# Allegro board CAD_EX73022.brd
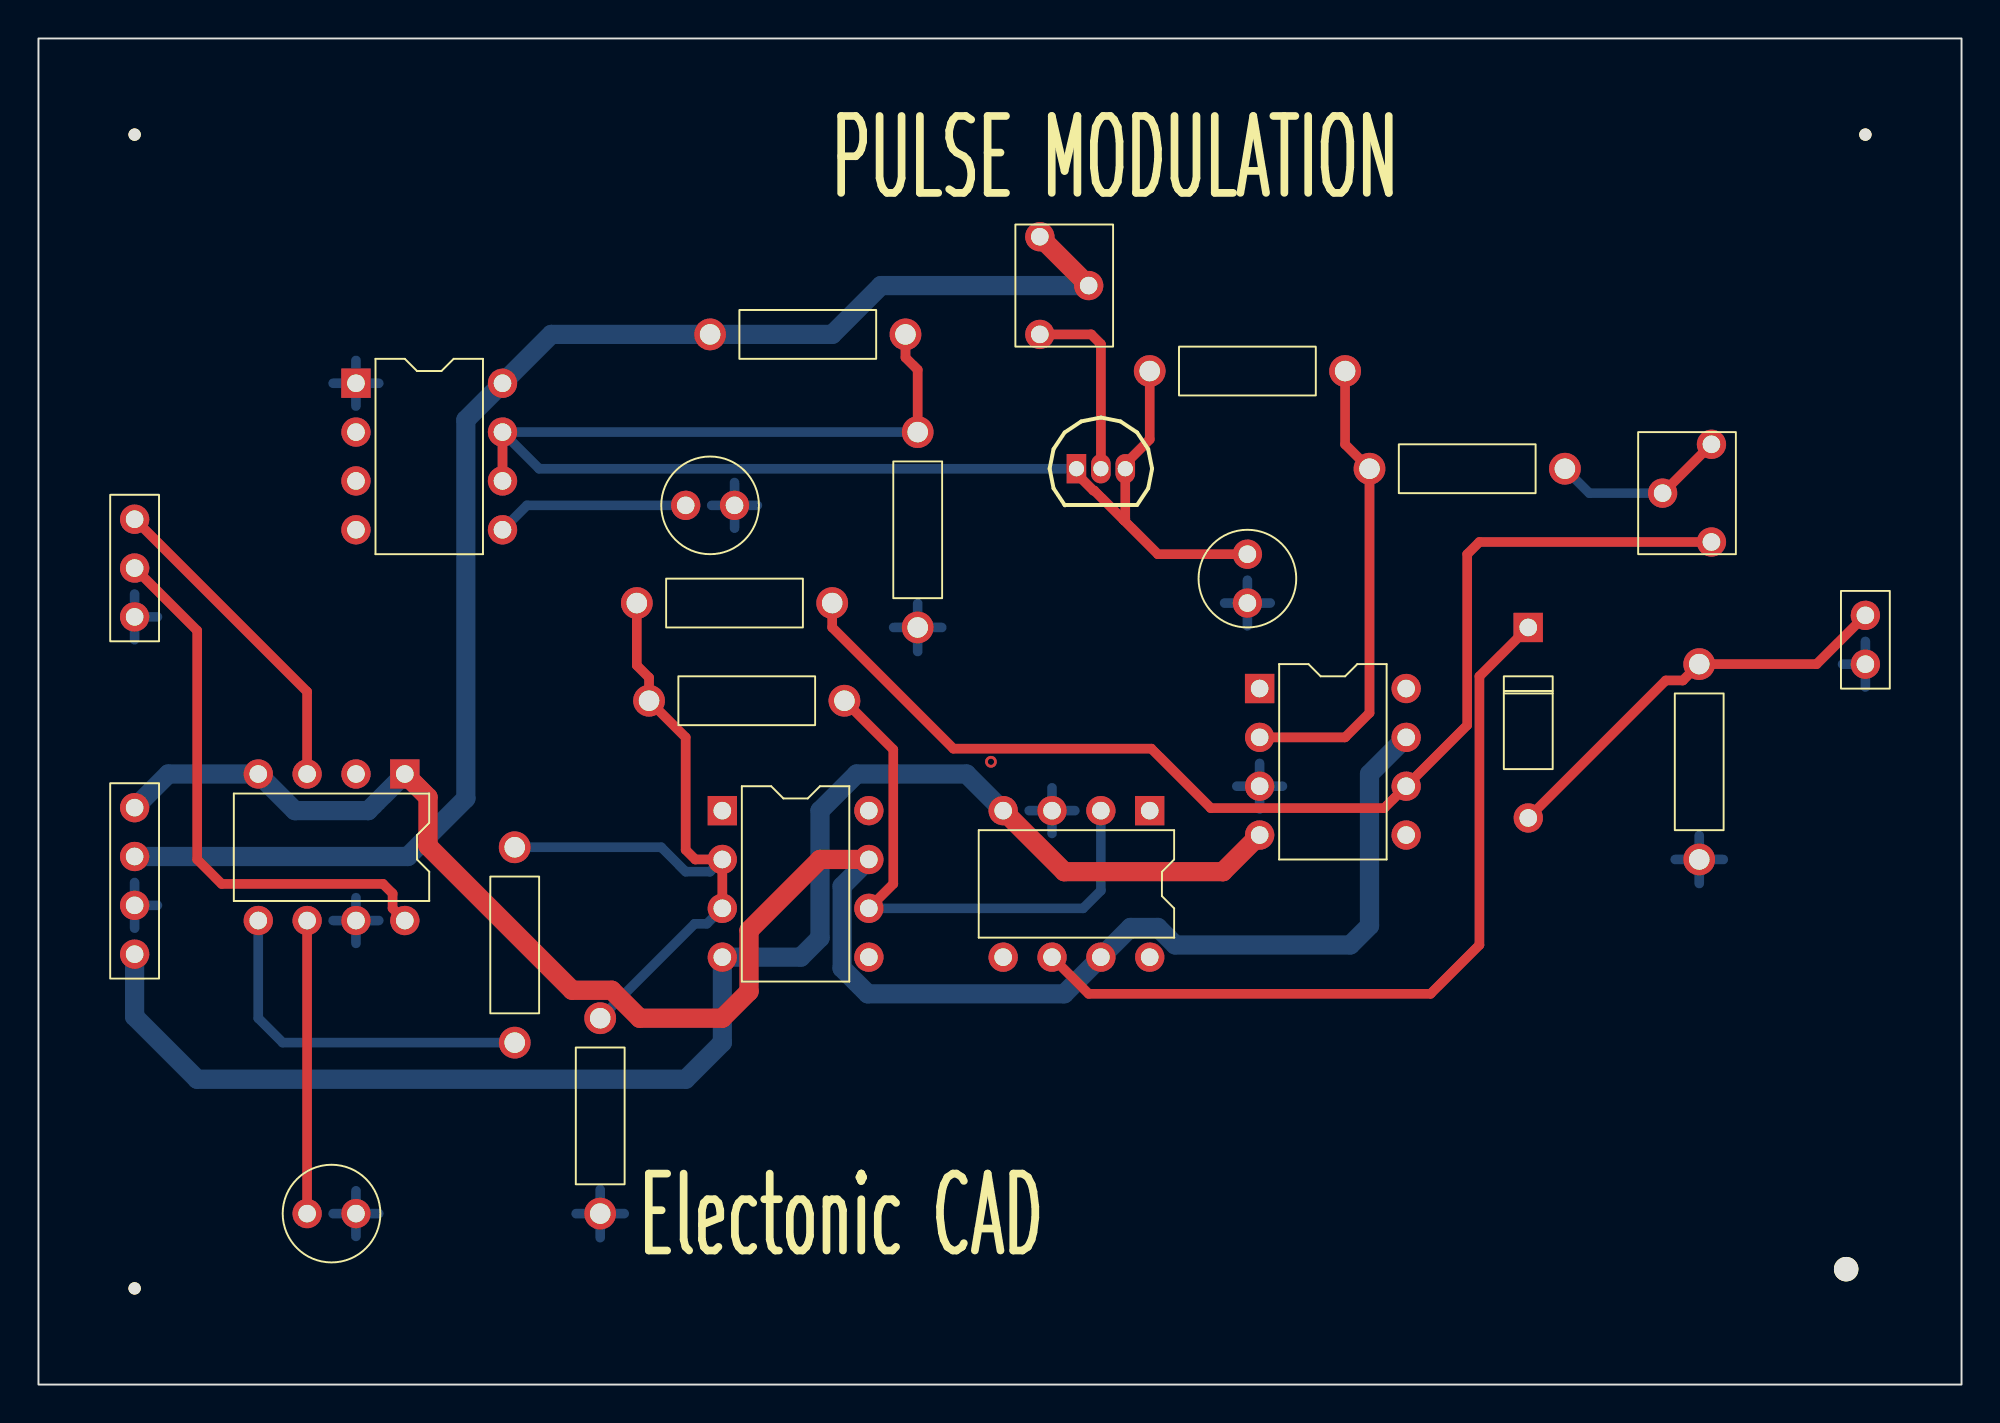
[diagram p0: board, top side]
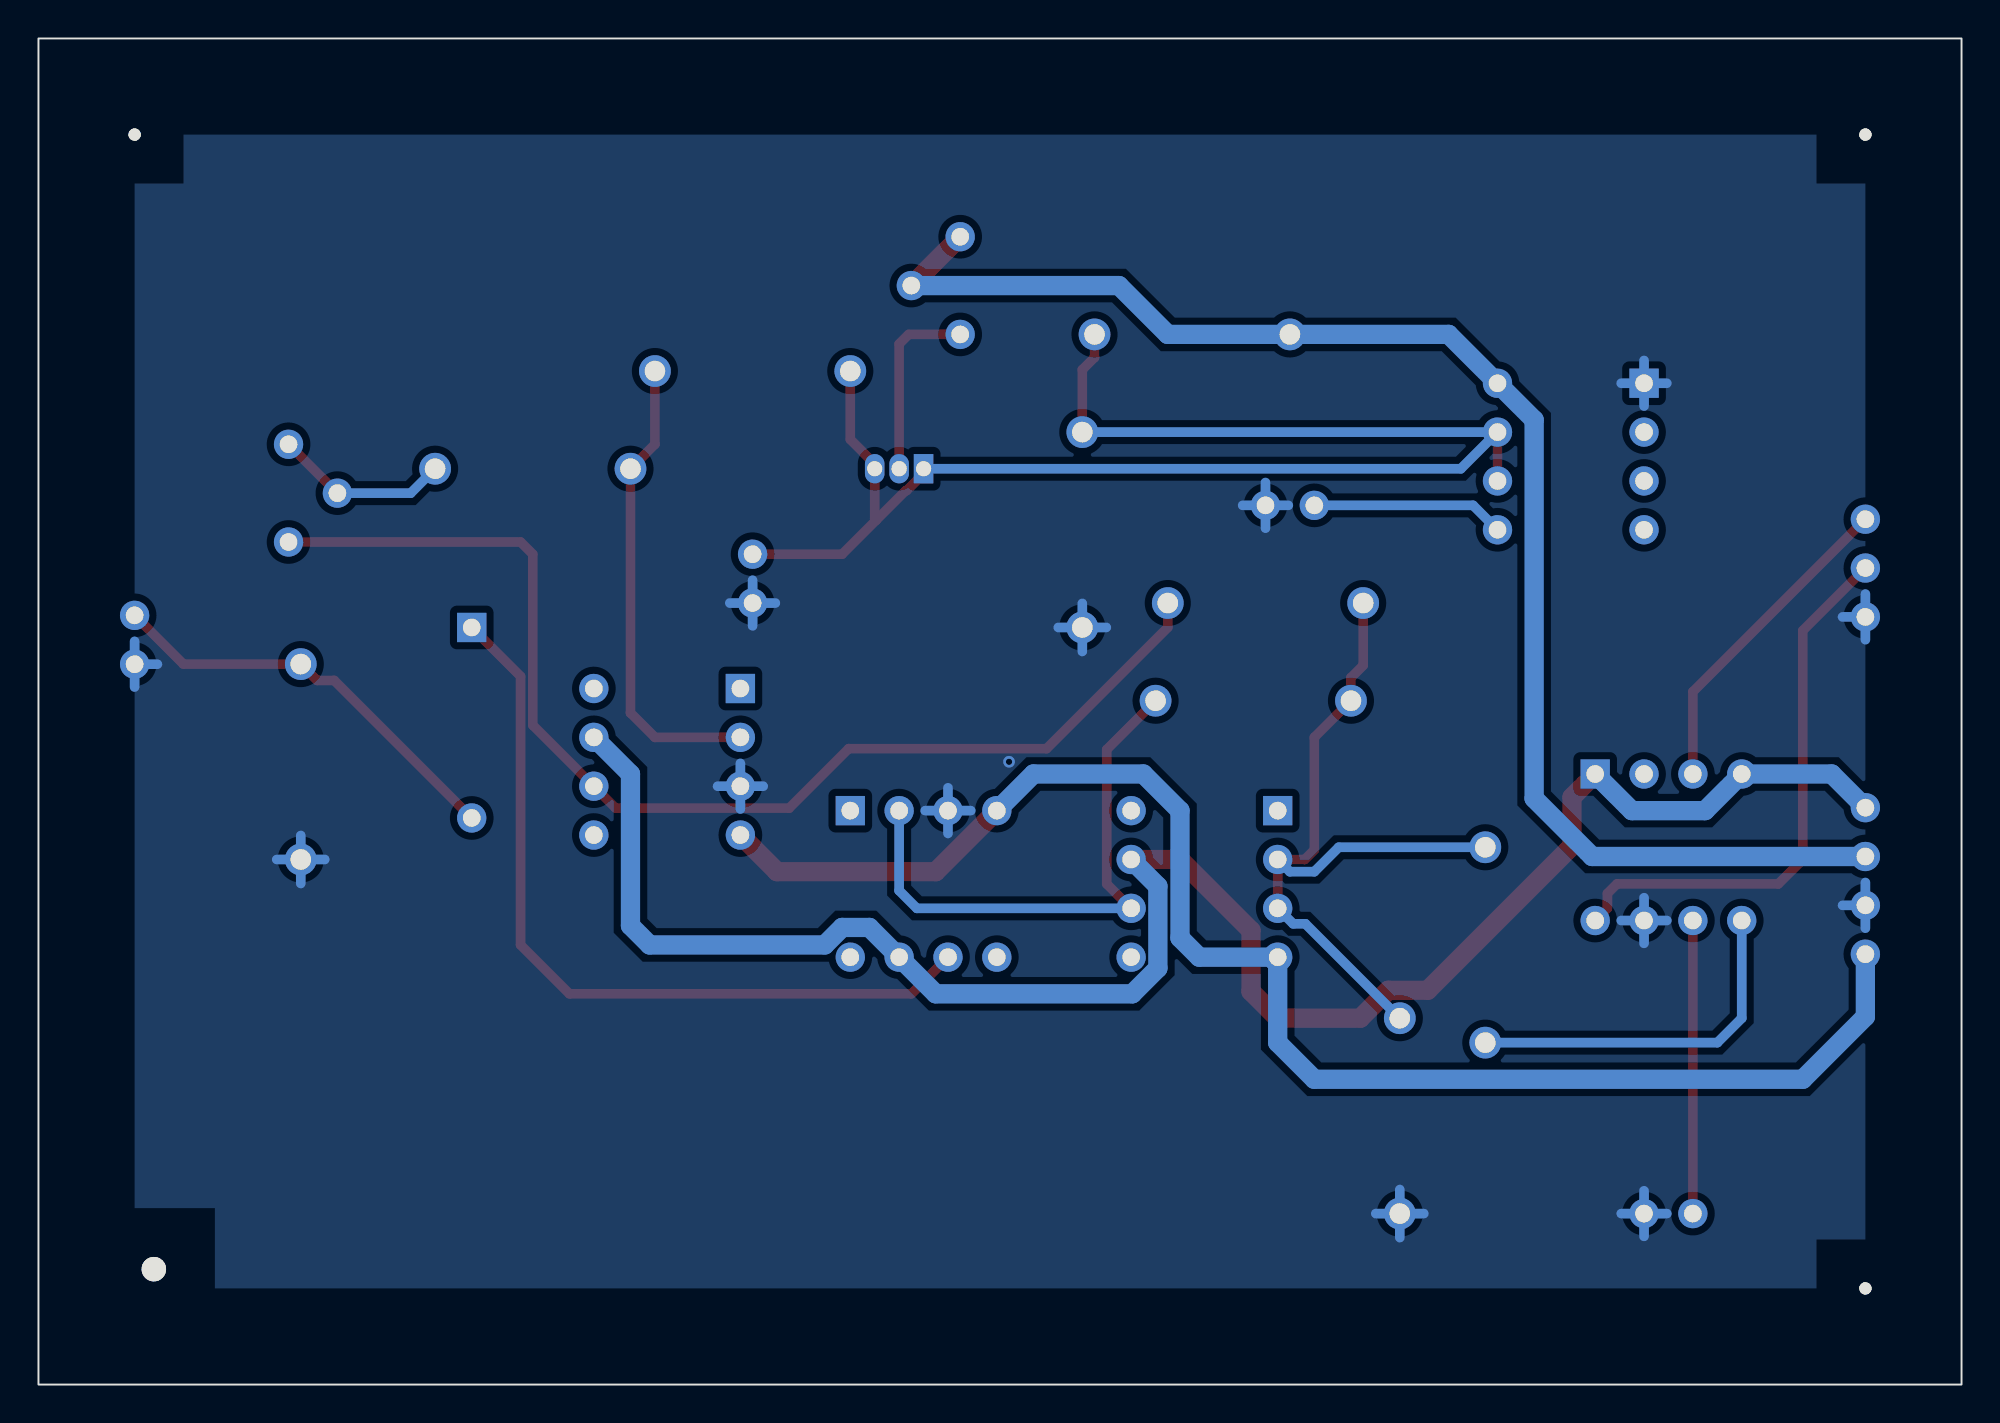
[diagram p1: board, bottom side, seen from below]

Outline 100 x 70 mm; copper layers: TOP, BOTTOM. Coordinates in mm from the lower left corner of the outline.
Outline path: rectangle 0,0 100,70

## Design rules (mm)
constraint set DEFAULT: min track width 0.5

## Placement (name value [footprint] x y rotation side)
C1  0.01uF  [CAP196]  62.87 43.18 180 top
C2  0.01uF  [CAP196]  36.2 45.72 90 top
C3  0.01uF  [CAP196]  13.97 8.89 270 top
D1  d  [DO41]  77.47 39.37 180 top
J1  CON4  [JUMPER4]  5 30 270 top
J2  CON3  [JUMPER3]  5 45 270 top
J3  CON2  [JUMPER2]  95 40 270 top
NOREF  -  [unnamed]  5 5 0 top
NOREF#2  -  [unnamed#2]  94 6 0 top
NOREF#3  -  [unnamed]  5 65 0 top
NOREF#4  -  [unnamed]  95 65 0 top
Q1  25A1015  [TO92]  53.98 47.62 0 top
R1  580  [RES400]  69.22 47.62 270 top
R2  39K  [RES400]  34.92 54.61 270 top
R3  6.2K  [RES400]  57.78 52.7 270 top
R4  100K  [RES400]  45.72 49.53 180 top
R5  10K  [RES400]  41.27 40.64 90 top
R6  10K  [RES400]  31.75 35.56 270 top
R7  10K  [RES400]  24.77 17.78 0 top
R8  10K  [RES400]  29.21 8.89 0 top
R9  10K  [RES400]  86.36 27.3 0 top
U1  NE555  [DIP8_3]  16.51 52.07 0 top
U2  LF356  [DIP8_3]  63.5 36.2 0 top
U3  LF398  [DIP8_3]  19.05 31.75 270 top
U4  LF356  [DIP8_3]  35.56 29.84 0 top
U5  LF356  [DIP8_3]  57.78 29.84 270 top
VR1  5K  [RESADJ]  52.07 54.61 180 top
VR2  20K  [RESADJ]  87 48.9 0 top

## Library data of the parts
C1-C3 = CAP NP: Tolerance: ***; User Part Number: ***
D1 = d_0
J1 = CON4_0: User Part Number: ***
J2 = CON3_0: User Part Number: ***
J3 = CON2: User Part Number: ***
Q1 = PNP BCE
R1-R9 = R: Tolerance: ***; User Part Number: ***
U1 = NE555_4: Tolerance: ***; User Part Number: ***
U2 = LF356_3: Tolerance: ***; User Part Number: ***
U3 = LF398: Tolerance: ***; User Part Number: ***
U4 U5 = LF356_2: Tolerance: ***; User Part Number: ***
VR1 VR2 = POT: Tolerance: ***; User Part Number: ***

## Footprints (pads in the part's own frame, mm; a bottom-side part is the same pattern mirrored in y, then rotated)
CAP196
  round 1.524 hole 0.914: 1(0,0) 2(0,2.54)
DIP8_3
  rect 1.524x1.524 hole 0.914: 1(0,0)
  round 1.524 hole 0.914: 2(0,-2.54) 3(0,-5.08) 4(0,-7.62) 5(7.62,-7.62) 6(7.62,-5.08) 7(7.62,-2.54) 8(7.62,0)
DO41
  rect 1.524x1.524 hole 0.914: 1(0,0)
  round 1.524 hole 0.914: 2(0,9.906)
JUMPER2
  round 1.524 hole 0.914: 1(0,0) 2(2.54,0)
JUMPER3
  round 1.524 hole 0.914: 1(0,0) 2(2.54,0) 3(5.08,0)
JUMPER4
  round 1.524 hole 0.914: 1(0,0) 2(2.54,0) 3(5.08,0) 4(7.62,0)
RES400
  round 1.651 hole 1.067: 1(0,0) 2(0,10.16)
RESADJ
  round 1.524 hole 0.914: 1(0,0) 2(-2.54,-2.54) 3(0,-5.08)
TO92
  rect 1.016x1.524 hole 0.787: 1(0,0)
  oval 1.016x1.524 hole 0.787: 2(1.27,0) 3(2.54,0)
unnamed
  round 0.635 hole 3.175 unplated: (0,0)
unnamed#2
  round 1.27 hole 3.962 unplated: (0,0)

## Nets
+5V: J1.2 R2.1 U1.8(VCC) VR1.2(WIPER) VR1.3
+15V: J1.1 U2.7(V5) U3.1 U3.4(VCC-) U4.7 U5.7
-15V: J1.4 U2.4 U4.4(V-) U5.4(V-)
GND: C1.2 C2.1 C3.2 J1.3 J2.3 J3.2 R4.2 R8.1 R9.1 U1.1 U2.3 U3.7 U5.3
CLOCK: U1.2
SIG_1: R5.1 U2.6 VR2.3
N00375: C1.1 Q1.1 Q1.3(E) R2.2 R3.1 R4.1 U1.6 U1.7
N00403: C2.2 U1.5
N00660: Q1.2 VR1.1
N01426: R1.1 R3.2 U2.2
N02047: R1.2 VR2.1 VR2.2(WIPER)
N03268: J2.1 U3.3
N03284: J2.2 U3.8
N03449: C3.1 U3.6
N03576: R7.1 U3.5
N03657: R5.2 R6.1 R7.2 R8.2 U4.2 U4.3
N04198: R6.2 U4.6 U5.2
N04568: D1.1 U5.6
N04574: D1.2 J3.1 R9.2

Pads without a net: U1 3 4; U2 1 5 8; U3 2; U4 1 5 8; U5 1 5 8

## Via types
v1: diameter 0.61, hole 0.33, TOP to BOTTOM, 1 via

## Routing (per net, layer and track width the routed paths; a pad name or vN(x,y) marks a point on that pad's centre or on a via; arc(x,y) is an arc through that point)
+5V: length 77
  TOP w1: VR1.2 VR1.3
  BOTTOM w1: J1.2 19.2,27.46 22.23,30.48 22.23,50.16 U1.8 26.67,54.61 R2.1 41.27,54.61 43.81,57.15 VR1.2
+15V: length 99.5
  TOP w1: U4.7 40.64,27.3 36.95,23.61 36.95,20.44 35.56,19.05 31.26,19.05 29.81,20.5 27.76,20.5 20.26,28 20.26,30.54 U3.1
  BOTTOM w1: U2.7 69.22,31.75 69.22,23.86 68.22,22.86 59.11,22.86 58.2,23.77 56.79,23.77 U5.7 53.34,20.32 43.12,20.32 41.79,21.65 41.79,25.92 U4.7 ; U3.1 17.14,29.84 13.34,29.84 U3.4 6.75,31.75 J1.1
-15V: length 79
  TOP w1: U2.4 61.59,26.67 53.34,26.67 U5.4
  BOTTOM w1: J1.4 5,19.13 8.26,15.88 33.66,15.88 35.56,17.78 U4.4 39.64,22.23 40.64,23.23 40.64,29.84 42.55,31.75 48.26,31.75 U5.4
GND: length 58.9
  BOTTOM w0.5: J1.3 6.19,24.92 ; J1.3 5,23.73 ; J1.3 5,26.11 ; U2.3 63.5,32.3 ; U2.3 62.31,31.11 ; U2.3 64.69,31.11 ; U2.3 63.5,29.93 ; 35.01,45.72 C2.1 ; C2.1 37.38,45.72 ; C2.1 36.2,46.91 ; C2.1 36.2,44.53 ; U3.7 17.7,24.13 ; U3.7 15.32,24.13 ; U3.7 16.51,22.94 ; U3.7 16.51,25.32 ; J2.3 6.19,39.92 ; J2.3 5,38.73 ; J2.3 5,41.11 ; 95,36.27 J3.2 ; J3.2 95,38.65 ; J3.2 93.81,37.46 ; 16.51,7.7 C3.2 ; C3.2 16.51,10.08 ; C3.2 15.32,8.89 ; C3.2 17.7,8.89 ; C1.2 64.05,40.64 ; C1.2 62.87,41.83 ; C1.2 61.68,40.64 ; C1.2 62.87,39.45 ; 29.21,7.64 R8.1 ; R8.1 29.21,10.14 ; R8.1 27.96,8.89 ; R8.1 30.46,8.89 ; R9.1 86.36,28.55 ; R9.1 85.11,27.3 ; R9.1 87.61,27.3 ; R9.1 86.36,26.06 ; 45.72,38.12 R4.2 ; R4.2 45.72,40.62 ; R4.2 46.97,39.37 ; R4.2 44.47,39.37 ; U1.1 17.7,52.07 ; U1.1 16.51,50.88 ; U1.1 16.51,53.26 ; U1.1 15.32,52.07 ; 51.52,29.84 U5.3 ; U5.3 52.7,28.66 ; U5.3 53.89,29.84 ; U5.3 52.7,31.03
  vias: v1(49.53,32.38)
SIG_1: length 61.8
  TOP w0.5: VR2.3 74.93,43.81 74.3,43.18 74.3,34.29 U2.6 69.98,29.98 60.96,29.98 57.87,33.07 47.58,33.07 41.27,39.37 R5.1
N00375: length 79.3
  TOP w0.5: C1.1 58.21,43.18 56.44,44.95 ; 56.44,44.95 54.9,46.49 54.86,46.49 53.98,47.37 Q1.1 ; 56.44,44.95 56.52,45.03 Q1.3 56.52,47.88 57.78,49.15 R3.1 ; R4.1 45.72,52.77 45.09,53.41 R2.2 ; U1.7 U1.6
  BOTTOM w0.5: R4.1 U1.7 26.04,47.62 Q1.1
N00403: length 10.1
  BOTTOM w0.5: C2.2 25.4,45.72 U1.5
N00660: length 9.9
  TOP w0.5: 55.24,47.62 55.24,54.11 54.74,54.61 VR1.1
N01426: length 24.5
  TOP w0.5: U2.2 67.94,33.66 69.22,34.92 R1.1 67.94,48.9 R3.2
N02047: length 9.2
  TOP w0.5: VR2.2 VR2.1
  BOTTOM w0.5: VR2.2 80.64,46.35 R1.2
N03268: length 17
  TOP w0.5: J2.1 13.97,36.03 U3.3
N03284: length 29.1
  TOP w0.5: J2.2 8.26,39.2 8.26,27.3 9.53,26.04 17.91,26.04 18.41,25.54 18.41,24.77 U3.8
N03449: length 15.2
  TOP w0.5: C3.1 U3.6
N03576: length 18.9
  BOTTOM w0.5: R7.1 12.7,17.78 11.43,19.05 U3.5
N03657: length 38.8
  TOP w0.5: R5.2 31.11,37.4 31.75,36.76 R6.1 33.66,33.66 33.66,27.8 34.16,27.3 U4.2 U4.3
  BOTTOM w0.5: R7.2 32.38,27.94 33.66,26.67 34.92,26.67 U4.2 ; U4.3 34.75,23.96 34.12,23.96 R8.2
N04198: length 29
  TOP w0.5: U4.6 44.45,26.04 44.45,33.02 R6.2
  BOTTOM w0.5: U5.2 55.24,25.69 54.32,24.77 U4.6
N04568: length 41.6
  TOP w0.5: D1.1 74.93,36.83 74.93,22.86 72.39,20.32 54.61,20.32 U5.6
N04574: length 21.9
  TOP w0.5: J3.1 92.47,37.47 R9.2 85.51,36.61 84.62,36.61 D1.2

## Copper pours and planes (outline as drawn; the poured copper is in the pictures)
GND on BOTTOM: 5,5 5,65 95,65 95,5

## Text on the board
Ref Des/Silkscreen Top: Electonic CAD | PULSE MODULATION
